# Altium PCB PCB1.PcbDoc
Units mil, origin at the board's own origin, x right, y up, seen from the top; angles counter-clockwise.
Board outline 3555 x 1210 mil, 2 copper layers (Top Layer, Bottom Layer); 2 components, 6 nets, 14 pads, 0 vias.
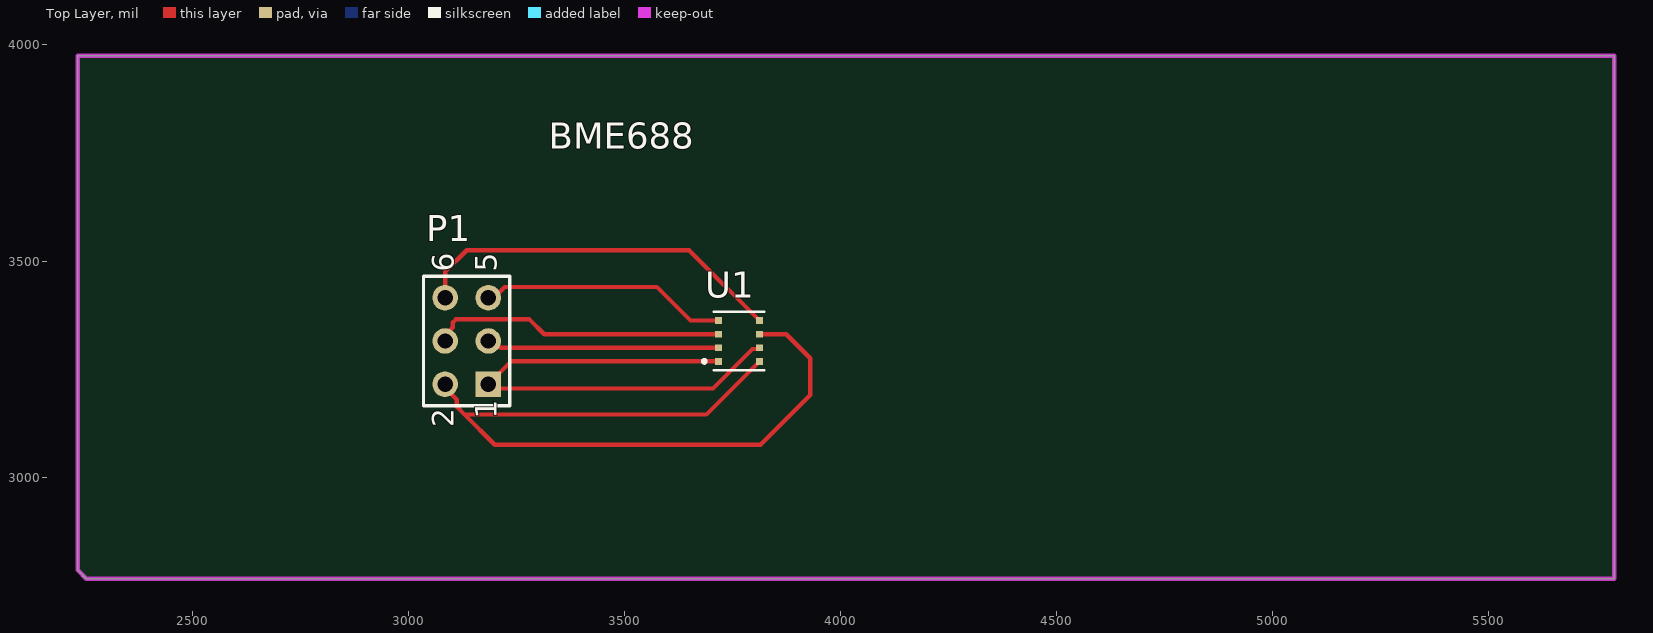
[diagram p0: Top Layer view]
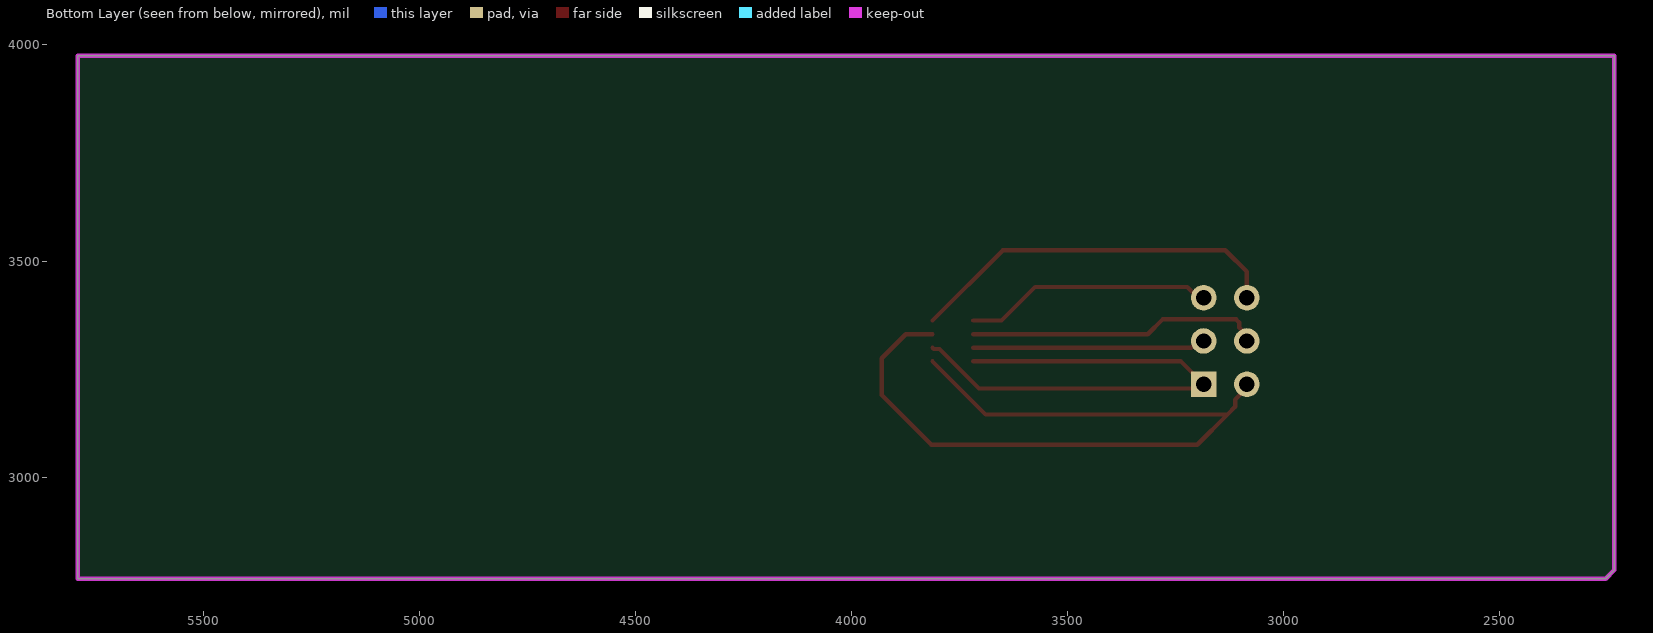
[diagram p1: Bottom Layer view, seen from below]

## Layer stack, top to bottom
Top Solder: solder mask 0.4, Solder Resist, Dk 3.5
Top Layer: signal copper 1.4
Dielectric 1: dielectric 12.6, FR-4, Dk 4.8
Bottom Layer: signal copper 1.4
Bottom Solder: solder mask 0.4, Solder Resist, Dk 3.5

## Board outline
2255,2765 2235,2785 2235,3975 5790,3975 5790,2765

## Design rules (kind name [scope] priority, off if disabled: settings)
Clearance [All] p1: gap=10 ignorepadtopadclearanceinfootprint=FALSE except(0: Arc-Hole Track-Hole SMDPad-Hole THPad-Hole Via-Hole Fill-Hole Poly-Hole Region-Hole Text-Hole)
PolygonConnect [All] p1: connectstyle=Relief reliefconductorwidth=10 reliefentries=4 polygonreliefangle="90 Angle" airgapwidth=10
RoutingVias [All] p1: holewidth=28 width=50 viastyle="Through Hole" minholewidth=28 minwidth=50 maxholewidth=28 maxwidth=50
SolderMaskExpansion [All] p1: expansion=4 istentingtop=FALSE
Width [All] p1: maxlimit=10 minlimit=10 preferedwidth=10
30 further rules are at their usual default settings.

## Components (designator, comment, footprint, x,y, rotation, side; value= is the part's Value field where it differs from the comment)
P1 "Header 3X2" HDR2X3 3185,3215 r90 top
U1 "BME688" IC_BME688 3765,3315 r180 top

## Footprints (in the part's own frame and the unit in brackets; to place one, negate y for a bottom-side part, rotate by r counter-clockwise, add the part's x,y. Pads: shape width x height; smd on the part's side, far side on the other; paste and mask are expansions set on the pad)
HDR2X3 [mm] "Connector; Header; 3x2 Position"
  rect 1.5x1.5 hole 0.9: 1(0,0)
  round 1.5 hole 0.9: 2(0,2.54) 3(2.54,0) 4(2.54,2.54) 5(5.08,0) 6(5.08,2.54)
  silkscreen extent -1.27,-1.27 6.35,3.81
IC_BME688 [mm]
  rect 0.4x0.4 smd: 1(1.2,1.2) 2(1.2,0.4) 3(1.2,-0.4) 4(1.2,-1.2) 5(-1.2,-1.2) 6(-1.2,-0.4) 7(-1.2,0.4) 8(-1.2,1.2)
  silkscreen extent -1.5,-1.72 2.14,1.72, body extent -1.5,-1.5 1.5,1.5, height 1

## Part data
P1: "Header 2x3", LatestRevisionDate=17-Jul-2002, LatestRevisionNote="Re-released for DXP Platform.", Publisher="Altium Limited"
U1: "Gas sensor measuring relative humidity, barometric pressure, ambient temperature and gas (VOC)", Package=None, Availability=Unavailable, MF="{'manufacturer': u'Bosch Sensortec'}", MP=BME688, Price=None

## Nets (pads, with @x,y where several pads share a name; then routed paths per layer and width w, separated by ;. In a path a pad name is that pad's centre, name@x,y a point inside that pad or via, vN(x,y) a via of type N, cw(c..) or ccw(c..) an arc to the next point about the centre after c; other vN are vias at no path point)
CSB: P1.3 U1.2 | length 539.3
  Top Layer w10: P1.3 3198.27,3315 3214.02,3299.25 U1.2
GND: P1.1 U1.1 U1.7 | length 1225
  Top Layer w10: U1.1 3237.76,3267.76 P1.1 3195,3205 3705,3205 3796.38,3296.38 3809.37,3296.38 U1.7
SCK: P1.5 U1.4 | length 575.3
  Top Layer w10: P1.5 3197.97,3415 3222.97,3440 3575,3440 3652.76,3362.24 U1.4
SDI: P1.4 U1.3 | length 682.3
  Top Layer w10: P1.4 3085,3328.27 3102.93,3346.2 3102.93,3357.93 3110,3365 3280,3365 3314.25,3330.75 U1.3
SDO: P1.6 U1.5 | length 875.4
  Top Layer w10: P1.6 3085,3475 3135,3525 3649.49,3525 U1.5
VCC_3.3: P1.2 U1.6 U1.8 | length 1924.2
  Top Layer w10: P1.2 3085,3206.41 3112.19,3179.22 3112.19,3162.81 3130,3145 ; U1.8 3689.49,3145 3130,3145 ; U1.6 3874.25,3330.75 3930,3275 3930,3190 3815,3075 3200,3075 3130,3145

## Keep-outs
Keep-Out Layer:
  the board outline again, w10

## Silkscreen, mask and mechanical layers (free items; w line width, h text height)
Top Overlay:
  text "BME688" at 3325,3760 h60

## Text inside footprints (layer, text, board x,y; h text height)
P1: Top Overlay "6" at 3105,3475 h50 r90; Top Overlay "5" at 3205,3475 h50 r90; Top Overlay "2" at 3105,3115 h50 r90; Top Overlay "1" at 3205,3135 h50 r90